# EAGLE board design1 (EAGLE 9.5.1)
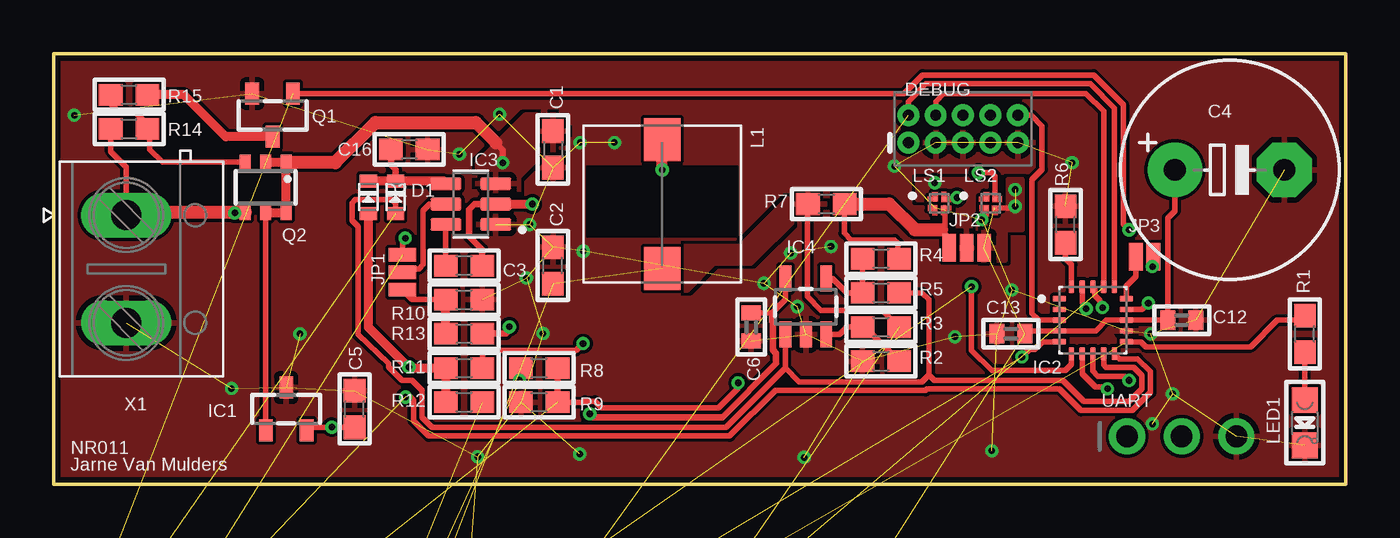
[diagram p0: board, top side]
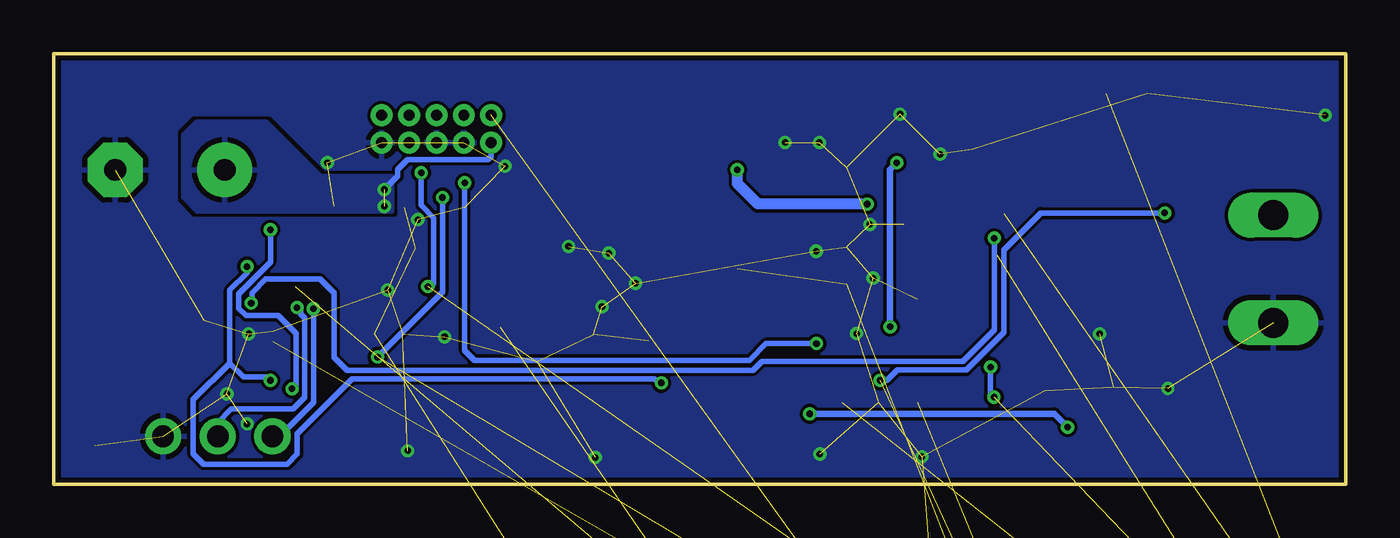
[diagram p1: board, bottom side, seen from below]

Size 60 x 20 mm. Coordinates in mm from the lower left corner, seen from the top.
Outline: 0,0 0,20 60,20 60,0 0,0
Copper layers (1*16): Top 0.035mm / dielectric 1.5mm / Bottom 0.035mm
Design rules "SeeedStudio_2layer_DRU_no_angle_20140221-2": minimum track width 6mil, minimum drill 12mil, track to track 6mil, track to pad 6mil, pad to pad 6mil, via to via 6mil, smd to smd 0mil, copper to edge 10mil, drill to drill 10mil, minimum pad ring 10mil, minimum via ring 6mil, stop-mask expansion 2mil, vias tented up to drill 100mil, thermal gap 10mil

## Footprints (pad centres in the part's own frame; a part is rotated, then mirrored left to right if it is on the bottom)
0603 = smd 1.1 x 1: 1 -0.85,0; 2 0.85,0
E5-10,5 = drill 1.016 pad 2.54: + -2.54,0 | drill 1.016 pad 2.54 octagon: - 2.54,0
0402 = smd 0.7 x 0.9: 1 -0.65,0; 2 0.65,0
0402' = smd 0.85 x 0.9: 1 -0.58,0; 2 0.58,0
C0603 = smd 1.1 x 1: 1 -0.85,0; 2 0.85,0
SOD-523 = smd 0.8 x 0.6: A 0,-0.75; K 0,0.75
SOD-123 = smd 1.4 x 1.4: A 1.85,0; C -1.85,0
SOD323-R = smd 0.6 x 0.6: A 1.1,0; C -1.1,0
2X5-PTH-1.27MM = drill 0.508 pad 1: 1 -2.54,-0.635; 2 -2.54,0.635; 3 -1.27,-0.635; 4 -1.27,0.635; 5 0,-0.635; 6 0,0.635; 7 1.27,-0.635; 8 1.27,0.635; 9 2.54,-0.635; 10 2.54,0.635
SOT23-R = smd 0.635 x 1.016: 1 -0.95,-1; 2 0.95,-1; 3 0,1
QFN50P300X300X60-21N = smd 0.62 x 0.26: 1 -1.555,1; 2 -1.555,0.5; 3 -1.555,0; 4 -1.555,-0.5; 5 -1.555,-1; 11 1.555,-1; 12 1.555,-0.5; 13 1.555,0; 14 1.555,0.5; 15 1.555,1 | smd 0.26 x 0.62: 6 -1,-1.555; 7 -0.5,-1.555; 8 0,-1.555; 9 0.5,-1.555; 10 1,-1.555; 16 1,1.555; 17 0.5,1.555; 18 0,1.555; 19 -0.5,1.555; 20 -1,1.555
SOT95P280X110-6N = smd 1.45 x 0.59: 1 -1.155,0.95; 2 -1.155,0; 3 -1.155,-0.95; 4 1.155,-0.95; 5 1.155,0; 6 1.155,0.95
SOT23-5 = smd 0.55 x 1.2: 1 -0.95,-1.3; 2 0,-1.3; 3 0.95,-1.3; 4 0.95,1.3; 5 -0.95,1.3
QFN48-6X6MM = smd 0.88 x 0.23: 1 -2.96,2.2; 2 -2.96,1.8; 3 -2.96,1.4; 4 -2.96,1; 5 -2.96,0.6; 6 -2.96,0.2; 7 -2.96,-0.2; 8 -2.96,-0.6; 9 -2.96,-1; 10 -2.96,-1.4; 11 -2.96,-1.8; 12 -2.96,-2.2; 25 2.96,-2.2; 26 2.96,-1.8; 27 2.96,-1.4; 28 2.96,-1; 29 2.96,-0.6; 30 2.96,-0.2; 31 2.96,0.2; 32 2.96,0.6; 33 2.96,1; 34 2.96,1.4; 35 2.96,1.8; 36 2.96,2.2 | smd 0.23 x 0.88: 13 -2.2,-2.96; 14 -1.8,-2.96; 15 -1.4,-2.96; 16 -1,-2.96; 17 -0.6,-2.96; 18 -0.2,-2.96; 19 0.2,-2.96; 20 0.6,-2.96; 21 1,-2.96; 22 1.4,-2.96; 23 1.8,-2.96; 24 2.2,-2.96; 37 2.2,2.96; 38 1.8,2.96; 39 1.4,2.96; 40 1,2.96; 41 0.6,2.96; 42 0.2,2.96; 43 -0.2,2.96; 44 -0.6,2.96; 45 -1,2.96; 46 -1.4,2.96; 47 -1.8,2.96; 48 -2.2,2.96 | smd 4.6 x 4.6: EP 0,0
SMT-JUMPER_3_NO_NO-SILK = smd 0.635 x 1.27: 1 -0.813,0; 2 0,0; 3 0.813,0
SMT-JUMPER_2_NO_NO-SILK = smd 0.635 x 1.27: 1 -0.406,0; 2 0.406,0
WE-PD_7332/7345_PLASTIC_BASE = smd 2 x 1.7: 1 -3,0; 2 3,0
_0603MP = smd 0.8 x 0.8: 1 -0.762,0; 2 0.762,0
CHIPLED_0805 = smd 1.2 x 1.2: A 0,-1.05; C 0,1.05
IC_MIC94081YFT-TR = smd 0.2 x 0.2: 1 -0.2,0.2; 2 -0.2,-0.2; 3 0.2,-0.2; 4 0.2,0.2
TSOP-6.PAC = smd 0.508 x 0.7: 1 -0.95,-1.163; 2 0,-1.163; 3 0.95,-1.163; 4 0.95,1.163; 5 0,1.163; 6 -0.95,1.163
1X03_ROUND = drill 1 pad 1.676: 1 -2.54,0; 2 0,0; 3 2.54,0
1X04_ROUND = drill 1 pad 1.676: 1 -3.81,0; 2 -1.27,0; 3 1.27,0; 4 3.81,0
434111043826 = smd 2.3 x 1.5: 1 -3.35,0; 2 3.35,0
DG306-5.0-02P = drill 1.4 long: 1 -2.5,0; 2 2.5,0
U.FL = smd 2.2 x 1.05: 1 0,1.375; 2 0,-1.375 | smd 0.8 x 1: 3 1.525,0
CRYSTAL-SMD-2.0X1.6MM = smd 0.75 x 0.7: 1 -0.675,-0.5; 2 0.675,-0.5; 3 0.675,0.5; 4 -0.675,0.5
CRYSTAL-SMD-3.2X1.5MM = smd 1 x 1.8: P$1 -1.25,0; P$2 1.25,0

## Placement (x,y rotation side)
C1  10u  [0603]  23.18,15.56 270 top
C2  10u  [0603]  23.18,10.16 90 top
C3  100n  [0603]  19.05,10.16 0 top
C4  LTO  [E5-10,5]  54.61,14.61 0 top
C5  10u  [0603]  13.97,3.49 90 top
C6  100n  [0402]  32.38,7.3 270 top
C7  10u  [0603]  -6.85,-71.56 0 top  (outside the outline)
C12  100n  [0402]  52.39,7.62 0 top
C13  100n  [0402]  44.45,6.99 180 top
C16  100p  [0603]  16.51,15.56 180 top
C29  100n  [0603]  -1.87,-51.96 0 top  (outside the outline)
C62  6pF  [0402']  15.71,-49.32 0 top  (outside the outline)
C63  6pF  [0402']  18.2,-49.32 0 top  (outside the outline)
C64  15pF  [0402']  7.47,-49.32 0 top  (outside the outline)
C65  15pF  [0402']  10.27,-49.32 0 top  (outside the outline)
C66  0.1uF  [0402']  21.31,-45.43 0 top  (outside the outline)
C67  4.7uF  [0603]  14.94,-45.43 0 top  (outside the outline)
C68  0.1uF  [0402']  -7.16,-49.32 0 top  (outside the outline)
C69  0.1uF  [0402']  -4.2,-49.32 0 top  (outside the outline)
C70  DNP  [0402']  20.69,-49.32 0 top  (outside the outline)
C71  1.0uF  [0402']  -1.24,-49.32 0 top  (outside the outline)
C72  0.8pF  [0402']  1.71,-49.32 0 top  (outside the outline)
C73  100pF  [0402']  18.2,-45.43 0 top  (outside the outline)
C74  DNP  [0402']  23.18,-49.32 0 top  (outside the outline)
C76  12p  [0402']  -7.31,-52.58 0 top  (outside the outline)
C77  12p  [0402']  -4.82,-52.58 0 top  (outside the outline)
CRST  100n  [C0603]  -7.16,-28.78 0 top  (outside the outline)
D1  SDM03U40  [SOD-523]  15.88,13.34 0 top
D2  SDM03U40  [SOD-523]  14.61,13.34 0 top
D3  512-SS24FL  [SOD-123]  -5.91,-61.14 0 top  (outside the outline)
D4  [SOD323-R]  -15.4,-75.77 0 top  (outside the outline)
DEBUG  CORTEX_DEBUGPTH  [2X5-PTH-1.27MM]  42.23,16.51 0 top
DEBUG1  CORTEX_DEBUGPTH  [2X5-PTH-1.27MM]  15.4,-20.85 0 top  (outside the outline)
IC1  [SOT23-R]  10.79,3.49 0 top
IC2  STM32L011F3U6TR  [QFN50P300X300X60-21N]  48.26,7.62 0 top
IC3  TPS54308DDCR  [SOT95P280X110-6N]  19.37,13.02 180 top
IC4  MCP6486T-E/OT  [SOT23-5]  34.92,8.26 0 top
IC12  NRF52832  [QFN48-6X6MM]  -5.13,-22.09 0 top  (outside the outline)
JP1  JUMPER-SMT_3_NO_NO-SILK  [SMT-JUMPER_3_NO_NO-SILK]  16.19,9.84 90 top
JP2  JUMPER-SMT_3_NO_NO-SILK  [SMT-JUMPER_3_NO_NO-SILK]  42.4,10.99 0 top
JP3  JUMPER-SMT_2_NO_NO-SILK  [SMT-JUMPER_2_NO_NO-SILK]  50.66,10.57 0 top
JP4  JUMPER-SMT_2_NO_NO-SILK  [SMT-JUMPER_2_NO_NO-SILK]  14.62,-41.69 0 top  (outside the outline)
JP5  JUMPER-SMT_3_NO_NO-SILK  [SMT-JUMPER_3_NO_NO-SILK]  -10.58,-70.79 0 top  (outside the outline)
L1  27uH  [WE-PD_7332/7345_PLASTIC_BASE]  28.26,13.02 270 top
L2  3.9nH  [0402']  4.67,-49.32 0 top  (outside the outline)
L4  15nH  [0402']  13.07,-49.32 0 top  (outside the outline)
L5  10uH  [_0603MP]  11.98,-45.58 0 top  (outside the outline)
LED1  [CHIPLED_0805]  58.1,2.86 180 top
LS1  MIC94081YFT-TR  [IC_MIC94081YFT-TR]  41.13,13.05 0 top
LS2  MIC94081YFT-TR  [IC_MIC94081YFT-TR]  43.51,13.05 0 top
LS3  MIC94081YFT-TR  [IC_MIC94081YFT-TR]  -15.25,-81.21 0 top  (outside the outline)
Q1  BSS138  [SOT23-R]  10.16,17.14 180 top
Q2  SI3481DV  [TSOP-6.PAC]  9.84,13.79 180 top
R1  220  [0603]  58.1,6.99 90 top
R2  39k  [0603]  38.42,5.71 0 top
R3  1k  [0603]  38.42,7.3 0 top
R4  1k  [0603]  38.42,10.48 0 top
R5  39k  [0603]  38.42,8.89 0 top
R6  100k  [0603]  46.99,12.06 90 top
R7  R025  [0603]  35.88,13.02 180 top
R8  220k  [0603]  22.54,5.4 0 top
R9  4k7  [0603]  22.54,3.81 180 top
R10  10k  [0603]  19.05,8.57 0 top
R11  56k  [0603]  19.05,5.4 0 top
R12  15k  [0603]  19.05,3.81 0 top
R13  100k  [0603]  19.05,6.99 180 top
R14  10k  [0603]  3.49,16.51 0 top
R15  100k  [0603]  3.49,18.1 0 top
R16  47k  [0603]  -15.4,-77.94 0 top  (outside the outline)
R49  10k  [0603]  -0.78,-55.23 0 top  (outside the outline)
R50  10k  [0603]  5.29,-55.23 0 top  (outside the outline)
R60  10k  [0603]  5.29,-57.56 0 top  (outside the outline)
UART  [1X03_ROUND]  52.39,2.22 0 top
UART_INTERFACE  [1X04_ROUND]  0.31,-34.23 0 top  (outside the outline)
UPDATE  [434111043826]  3.11,-22.4 0 top  (outside the outline)
X1  DG3XX-02-5.0  [DG306-5.0-02P]  3.37,10 270 top
X2  [U.FL]  9.8,-21.94 0 top  (outside the outline)
Y1  32MHz  [CRYSTAL-SMD-2.0X1.6MM]  22.87,-41.69 0 top  (outside the outline)
Y2  32.768kHz  [CRYSTAL-SMD-3.2X1.5MM]  -6.07,-45.74 0 top  (outside the outline)

## Library data of the parts
C1-C3 C5-C7 C12 C13 C16 C29 D1-D3 IC1 L5 LED1 Q1 R1-R16 R49 R50 R60 UART UART_INTERFACE = microbuilder
C4 = rcl
C62 C63 = nrf52832-breakout-temp; PROD_ID: CAP-13455
C64 C65 C76 C77 = SparkFun-Capacitors; PROD_ID: CAP-13063
C66 C68 C69 = SparkFun-Capacitors; PROD_ID: CAP-12416
C67 = SparkFun-Capacitors; PROD_ID: CAP-08280
C70 C74 = SparkFun-Passives
C71 = SparkFun-Capacitors; PROD_ID: CAP-12417
C72 = nrf52832-breakout-temp; PROD_ID: CAP-13456
C73 = nrf52832-breakout-temp; PROD_ID: CAP-13458
CRST = rcl; SPICEPREFIX: C
D4 = diode
DEBUG DEBUG1 = SparkFun-Connectors
IC2 = STM32L011F3U6TR; A_MAX: 0.6; B_MAX: 0.3; B_MIN: 0.18; B_NOM: 0.25; D2_NOM: 1.5; D_MAX: 3.1; D_MIN: 2.9; D_NOM: 3.0; E2_NOM: 1.5; ENOM: 0.5; E_MAX: 3.1; E_MIN: 2.9; E_NOM: 3.0; L_MAX: 0.23; L_MIN: 0.13; L_NOM: 0.35; MANUFACTURER: STMicroelectronics; PIN_COUNT_D: 5.0; PIN_COUNT_E: 5.0; SNAPEDA_PACKAGE_ID: 23449; STANDARD: IPC 7351B
IC3 = TPS54308DDCR; AVAILABILITY: In Stock; DESCRIPTION: 4.5-V to 28-V Input, 3-A output, synchronous 350-kHz FCCM step-down converter; MF: Texas Instruments; MP: TPS54308DDCR; PACKAGE: SOT-23-THN-6 Texas Instruments; PRICE: None; PURCHASE-URL: https://pricing.snapeda.com/search/part/TPS54308DDCR/?ref=eda
IC4 = SparkFun-Retired; PROD_ID: IC-11991
IC12 = SparkFun-RF; PROD_ID: IC-13460
JP1-JP5 = SparkFun-Jumpers
L1 = EMCComponents (rev19b); WE-NUMBER: 7447789127/27uH
L2 L4 = nrf52832-breakout-temp; PROD_ID: NDUC-13457
LS1-LS3 = MIC94081YFT-TR; AVAILABILITY: In Stock; DESCRIPTION: Power Switch/Driver 1:1 P-Channel 2A 4-TMLF® (0.85x0.85); MF: Microchip; MP: MIC94081YFT-TR; PACKAGE: UFDFN-4 Microchip; PRICE: None
Q2 = transistor-power
UPDATE = Eagle_SWITCHES (rev18c)
X1 = degson
X2 = adafruit
Y1 = nrf52832-breakout-temp; PROD_ID: XTAL-13459
Y2 = SparkFun-Clocks; PROD_ID: XTAL-13062

## Nets
3.3V: C5.1 C6.1 IC1.2 IC4.5
!RESET!: CRST.1 DEBUG1.10 IC12.24 R60.2
ADC1: IC2.8 IC12.4 JP3.2 R8.2 R9.1
ANT: C72.2 IC12.30 L2.2
BUCK-OUT-1: D3.C R3.2 R7.2
BUCK-OUT-2: JP2.1 LS1.3 R4.2 R7.1
BUCK_EN: IC2.14 IC12.16 JP1.3
DCC: IC12.47 L5.1
DEC4: C71.2 IC12.46 L4.2
DEC5: C69.2 IC12.1
DEC6: C70.2 IC12.32
DEC8: C73.2 IC12.33
EN1: IC2.5 IC12.14 LS1.4
EN2: IC2.6 IC12.15 LS2.4
FB: C16.2 D1.K D2.K IC3.4
GND: C1.2 C2.2 C4.- C5.2 C6.2 C7.2 C12.2 C13.2 C16.1 C29.2 C62.1 C63.2 C64.1 C65.1 C66.2 C67.2 C68.2 C69.1 C70.1 C71.1 C72.1 C73.1 C74.2 C76.1 C77.1 CRST.2 D4.A DEBUG1.3 DEBUG1.5 DEBUG1.9 DEBUG.3 DEBUG.5 DEBUG.9 IC1.3 IC2.12 IC3.1 IC4.2 IC12.31 IC12.45 IC12.EP JP5.1 LED1.C LS1.2 LS2.2 LS3.2 Q1.2 R2.1 R6.2 R9.2 R10.2 R49.1 UART.3 UPDATE.1 X1.2 X2.1 X2.2
I2C_SCL: IC12.39
I2C_SDA: C76.2 IC12.38
LED: IC2.11 IC12.18 R1.2
MISO: IC12.41
MOSI: IC12.42
N$1: JP1.1 R10.1 R13.2
N$2: C3.1 IC3.6
N$3: C3.2 IC3.2 L1.1
N$4: Q1.3 R15.2
N$5: Q2.3 R14.2 R15.1
N$6: JP5.2 R12.2
N$7: IC3.5 JP1.2
N$8: IC4.4 R4.1 R5.1
N$9: IC4.3 R2.2 R3.1
N$10: Q2.4 R8.1 R14.1 R16.1 X1.1
N$11: IC2.15 JP3.1
N$13: C2.1 D3.A L1.2
N$20: LED1.A R1.1
N$45: C74.1 L2.1 X2.3
N$50: C77.2 IC12.37
N$53: L4.1 L5.2
NC: IC12.44
NRST: DEBUG.10 IC2.3
P00: C64.2 IC12.2 Y2.P$2
P01: C65.2 IC12.3 Y2.P$1
P05: IC12.7 UART_INTERFACE.3
P06: IC12.8 UART_INTERFACE.2
P07: IC12.9 UART_INTERFACE.4
P08: IC12.10 UART_INTERFACE.1
P09: IC12.11
P10: IC12.12
P16: C29.1 IC12.19 R50.1 UPDATE.2
P20: IC12.23
P22: IC12.27
P23: IC12.28
P24: IC12.29
P28: IC12.40
PB9: IC2.20 R6.1
PG: IC2.7 IC12.17 Q1.1
PWM-CHG: IC12.20 JP5.3
SCK: IC12.43
SWDCLK: DEBUG1.4 DEBUG.4 IC2.17 IC12.25 R49.2
SWDIO: DEBUG1.2 DEBUG.2 IC2.16 IC12.26
SWO/TDO: DEBUG1.6 IC12.21
USART2_RX: IC2.19 UART.1
USART2_TX: IC2.18 UART.2
V-ICHG: D1.A IC2.9 IC4.1 IC12.6 R5.2
V-VCHG: C7.1 D2.A IC2.10 IC12.5 R11.1 R12.1
VCHG: C4.+ C12.1 C13.1 DEBUG.1 IC2.4 IC2.13 JP2.3 JP4.1 LS2.3
VDD-AUX-EN: IC2.1
VDD_BLE: C66.1 C67.1 C68.1 DEBUG1.1 IC12.13 IC12.36 IC12.48 JP4.2 LS3.3 R50.2 R60.1
VIN: C1.1 IC1.1 IC3.3 Q2.1 Q2.2 Q2.5 Q2.6 R13.1
VMEAS: JP2.2 LS1.1 LS2.1 R11.2
WAKE-UP: D4.C IC12.22 R16.2
XC1: C62.2 IC12.34 Y1.3
XC2: C63.1 IC12.35 Y1.1

## Tracks (layer width: path | path; a pad name or v marks a point on that pad's centre or on a via)
3.3V  (via drill 0.3)
  Top 0.254: IC1.2 11.74,2.64 C5.1 v12.91,2.64 v12.91,2.65 | C6.1 33.35,7.95 33.98,8.57 IC4.5
  Top 0.305: 33.35,7.95 33.35,7.56 33.4,7.52 33.4,6.23 33.54,6.08 33.54,5.6 31.05,3.11 25.05,3.11 v24.89,3.27
  Bottom 0.305: v24.89,3.27 13.54,3.27 v12.91,2.65
!RESET!  (3 unrouted)
ADC1  (via drill 0.3)  (1 unrouted)
  Top 0.254: IC2.8 48.26,5.26 48.5,5.02 49.74,5.02 v49.94,4.82 | v51.02,10.11 51.02,10.54 JP3.2 | R9.1 24.61,3.81 24.65,3.85 25.13,3.85 25.44,3.54 30.87,3.54 31.78,4.45 v31.78,4.71
  Top 0.305: R9.1 R8.2
  Bottom 0.254: v49.94,4.82 50.09,4.98 51.18,4.98 51.83,5.62 | 51.83,5.62 51.83,9.01 51.03,9.81 v51.03,10.11 v51.02,10.11 | v31.78,4.71 31.93,4.71 32.11,4.88 46.15,4.88 48.7,2.33 48.7,1.4 49.16,0.93 53.05,0.93 53.52,1.4 53.52,3.93 51.83,5.62
ANT  (2 unrouted)
BUCK-OUT-1  (1 unrouted)
  Top 0.254: R3.2 38.49,8.08 35.63,8.08 35,8.71 35,12.99 R7.2
  pour Top: 22.87,9.8 25.51,9.8 26.76,11.05 31.89,11.05 34.38,13.54 35.78,13.54 35.78,12.45 34.54,12.45 32.36,10.27 30.65,10.27 29.4,9.02 24.58,9.02 23.8,8.25 22.87,8.25
BUCK-OUT-2
  Top 0.203: LS1.3 41.38,12.85
  Top 0.254: R4.2 39.2,10.54 39.2,11.2 39.05,11.36 37.03,11.36 36.72,11.67 36.72,13.01 R7.1 | JP2.1 41.58,11.47 41.23,11.82 41.38,11.98 41.38,12.84 41.38,12.85
  Top 0.61: R7.1 38.79,13.02 39.98,11.82 41.23,11.82
BUCK_EN  (via drill 0.3)  (1 unrouted)
  Top 0.254: JP1.3 16.19,11.43 v16.32,11.43 | v50.84,8.41 50.54,8.12 IC2.14
  Bottom 0.254: v16.32,11.43 16.32,7.18 17.78,5.71 27.11,5.71 27.54,5.29 46.38,5.29 46.99,5.9 46.99,8.89 47.62,9.53 50.16,9.53 50.8,8.89 50.8,8.45 v50.84,8.41
DCC  (1 unrouted)
DEC4  (2 unrouted)
DEC5  (1 unrouted)
DEC6  (1 unrouted)
DEC8  (1 unrouted)
EN1  (via drill 0.3)  (1 unrouted)
  Top 0.203: LS1.4 41.83,13.25
  Top 0.254: v44.96,5.91 45.3,6.26 45.57,6.26 45.93,6.62 IC2.5 | 41.83,13.25 41.85,13.22 v41.95,13.32
  Bottom 0.254: v41.95,13.32 41.95,8.93 v44.96,5.91
EN2  (via drill 0.3)  (1 unrouted)
  Top 0.254: IC2.6 47.26,5.57 46.98,5.29 43.56,5.29 42.63,6.22 v42.63,9.18 | LS2.4 43.71,14.32 43.56,14.47 v42.94,14.47
  Bottom 0.254: v42.94,14.47 42.94,12.96 42.35,12.37 42.35,9.34 42.51,9.18 v42.63,9.18
FB
  Top 0.305: D1.K 15.87,14.62 15.66,14.83 C16.2
  Top 0.406: IC3.4 18.09,14.09 D1.K D2.K
GND  (via drill 0.3)  (81 unrouted)
  Top 0.203: LS2.2 43.31,12.51
  Top 0.254: 43.31,12.51 v43.09,12.29
  other vias: 8.26,4.45 11.43,6.99 0.95,17.14 19.68,1.27 24.45,15.88 26.04,15.88 50.95,6.99 24.43,1.4 22.71,7 36.09,11.05 34.23,10.73 32.98,9.33 34.54,8.25 22.1,12.07 24.59,10.82 21.95,9.58 20.7,17.2 18.83,15.34 47.29,14.94 39.05,14.78 44.49,9.02 41.85,6.85 43.56,1.56 34.85,1.24 51.96,4.2 51.03,2.8
  pour Bottom (rank 6): -1.59,30.48 66.04,30.48 66.04,-8.57 -4.45,-8.57 -4.45,30.48
  pour Top (rank 6): -8.57,37.78 80.01,37.78 80.01,-17.78 -8.57,-17.78
I2C_SDA  (1 unrouted)
LED  (1 unrouted)
  Top 0.254: R1.2 57.89,7.62 56.83,7.62 55.59,6.38 50.72,6.38 50.48,6.62 IC2.11
N$1
  Top 0.254: JP1.1 16.65,8.57 R10.1
  Top 0.406: R13.2 R10.1
N$2
  Top 0.254: C3.1 18.2,12.05 IC3.6
N$3  (via drill 0.3)
  Top 0.305: IC3.2 19.55,13.02 19.29,12.76 19.29,11.51 19.9,10.9 C3.2
  Top 0.406: IC3.2 v22.23,13.02
  Top 0.508: v28.26,14.61 L1.1
  Bottom 0.508: v22.23,13.02 27.3,13.02 28.26,13.97 v28.26,14.61
N$4
  Top 0.406: Q1.3 7.99,16.14 6.03,18.1 R15.2
N$5
  Top 0.254: R15.1 2.64,17.68 2.98,17.34 3.33,17.34 3.4,17.27 3.81,17.27 4.34,16.73 R14.2 4.45,16.41 4.45,15.56 5.04,14.96 Q2.3
N$6  (1 unrouted)
N$7
  Top 0.254: JP1.2 16.36,10.01 16.96,10.01 17.16,10.2 17.16,11.68 17.16,12.71 17.46,13.02 IC3.5
N$8
  Top 0.254: R4.1 R5.1 36.83,8.89 36.16,9.55 IC4.4
N$9
  Top 0.254: IC4.3 36.48,6.96 36.83,7.3 R3.1 37.68,7.3 R2.2
N$10  (via drill 0.3)  (1 unrouted)
  Top 0.254: X1.1 3.37,14.73 2.64,15.46 R14.1 | R8.1 21.69,4.89 v21.62,4.82 | Q2.4 8.86,12.6 v8.4,12.6
  Top 0.406: X1.1 3.5,12.63
  Top 0.61: 3.5,12.63 8.4,12.63 Q2.4
  Bottom 0.254: v21.62,4.82 21.31,4.82 20.83,5.31 17.61,5.31 15.87,7.05 15.87,10.89 14.16,12.6 v8.4,12.6
N$11
  Top 0.254: IC2.15 49.81,9.21 50.25,9.65 JP3.1
N$13  (2 unrouted)
N$20
  Top 0.254: LED1.A R1.1
N$45  (2 unrouted)
N$50  (1 unrouted)
N$53  (1 unrouted)
NRST
  Top 0.254: IC2.3 45.74,7.62 45.43,7.93 45.43,14.16 45.9,14.62 45.9,16.65 45.4,17.14 DEBUG.10
P00  (2 unrouted)
P01  (2 unrouted)
P05  (1 unrouted)
P06  (1 unrouted)
P07  (1 unrouted)
P08  (1 unrouted)
P16  (3 unrouted)
PB9
  Top 0.254: IC2.20 47.26,10.21 46.99,10.48 R6.1
PG  (via drill 0.3)  (1 unrouted)
  Top 0.254: Q1.1 39.48,18.14 40.34,19.01 48.3,19.01 49.67,17.64 49.67,12.1 v49.94,11.82 | v48.93,4.43 48.85,4.51 48.38,4.51 47.76,5.14 IC2.7
  Bottom 0.254: v49.94,11.82 49.94,10.32 51.42,8.84 51.42,8.17 51.08,7.83 49.58,7.83 48.76,7 48.76,4.59 48.78,4.59 v48.93,4.43
PWM-CHG  (1 unrouted)
SWDCLK  (3 unrouted)
  Top 0.254: IC2.17 48.76,17.33 47.94,18.15 41.32,18.15 40.96,17.78 DEBUG.4
SWDIO  (2 unrouted)
  Top 0.254: IC2.16 49.26,17.48 48.13,18.6 40.51,18.6 39.69,17.78 DEBUG.2
SWO/TDO  (1 unrouted)
USART2_RX  (via drill 0.3)
  Top 0.254: IC2.19 47.76,8.44 47.94,8.26 v47.94,8.15
  Bottom 0.254: v47.94,8.15 47.94,3.8 49.52,2.22 UART.1
USART2_TX  (via drill 0.3)
  Top 0.254: IC2.18 48.35,9.08 48.35,8.77 48.58,8.54 48.58,8.26 48.63,8.2 v48.7,8.2
  Bottom 0.254: v48.7,8.2 48.53,8.03 48.53,7.91 48.35,7.73 48.35,4.04 48.9,3.49 51.75,3.49 52.39,2.86 UART.2
V-ICHG  (1 unrouted)
  Top 0.254: R5.2 40.32,8.89 40.64,8.57 40.64,5.08 | 40.64,5.08 40.32,4.76 34.61,4.76 33.97,5.4 | 33.97,5.4 IC4.1 | D1.A 15.87,13.07 15.71,13.22 14,13.22 13.85,13.07 13.85,12.25 14.12,11.97 14.12,6.95 15.56,5.6 15.56,5.45 16.18,4.82 16.65,4.82 17.11,4.36 17.11,3.11 17.58,2.65 31.22,2.65 33.97,5.4 | IC2.9 48.76,5.54 48.87,5.42 50.16,5.42 50.52,5.07 50.52,4.42 49.95,3.85 47.85,3.85 46.88,4.82 40.9,4.82 40.64,5.08
V-VCHG  (via drill 0.3)  (2 unrouted)
  Top 0.254: IC2.10 49.49,5.83 50.33,5.83 50.93,5.23 50.93,4.26 50.12,3.44 50.09,3.42 47.7,3.42 46.71,4.42 40.55,4.42 40.49,4.36 33.51,4.36 31.39,2.24 18.36,2.24 18.26,2.24 17.41,2.24 16.71,2.94 16.71,3.89 16.55,4.04 v16.34,4.04 | v16.49,5.45 16.51,5.43 16.51,5.4
  Top 0.406: D2.A 14.61,7.3 16.51,5.4 R11.1 R12.1
  Bottom 0.254: v16.34,4.04 16.49,4.2 v16.49,5.45
VCHG  (via drill 0.3)  (5 unrouted)
  Top 0.254: C13.1 45.23,7.12 IC2.4 48.4,7.12 48.9,7.62 IC2.13 C12.1 51.74,12.37 51.97,12.6 52.07,12.7 C4.+ | v44.65,12.91 44.58,12.84 LS2.3
  Bottom 0.254: DEBUG.1 39.69,15.23 39.83,15.09 43.56,15.09 44.03,14.62 44.03,14.31 v44.65,13.69
  pour Bottom: 44.32,14.29 47.62,14.29 50.16,16.83 53.34,16.83 53.98,16.19 53.98,13.34 53.34,12.7 44.32,12.7
  pour Top (rank 2): 43.56,12.91 44.18,12.91 44.34,13.07 44.34,14.16 44.96,14.16 44.96,11.82 44.18,11.82 44.18,10.42 42.94,10.42 42.94,11.67 43.56,12.29
VDD_BLE  (10 unrouted)
VIN  (via drill 0.3)
  Top 0.254: IC1.1 Q2.5
  Top 0.305: R13.1 19.92,7 21,7 21.16,7.16 v21.16,7.31 | 20.54,15.87 20.85,15.56 v20.85,14.94
  Top 0.406: Q2.5 Q2.6 Q2.1 Q2.2
  Top 0.61: Q2.1 13.05,14.96 13.07,14.94 14.94,16.8 19.6,16.8 20.54,15.87
  Bottom 0.305: v21.16,7.31 21.16,14.62 v20.85,14.94
  pour Top: 20,15.24 21.91,17.14 23.81,17.14 23.81,15.56 22.86,15.56 21.59,14.29 21.59,13.65 19.68,13.65 19.68,14.92
VMEAS  (via drill 0.3)
  Top 0.254: R11.2 19.91,5.41 19.91,6.07 20.05,6.21 20.38,6.21 24.25,6.21 24.43,6.38 v24.58,6.53
  Bottom 0.254: v24.58,6.53 26.91,6.53 27.69,5.76 40.45,5.76 40.92,6.22 v40.92,14
  pour Top: 40.14,13.22 42.01,13.22 42.01,10.73 42.78,10.73 42.78,13.22 43.41,13.22 43.41,14.16 40.14,14.16
WAKE-UP  (2 unrouted)
XC1  (2 unrouted)
XC2  (2 unrouted)

## Text on the board
tPlace: Jarne Van Mulders | NR011